# Altium PCB WRTnode2P_DB.PcbDoc (part 1 of 2)
Units mm, origin at the board's own origin, x right, y up, seen from the top; angles counter-clockwise.
Board outline 65.41 x 52.58 mm, 2 copper layers (Top Layer, Bottom Layer); 91 components, 81 nets, 456 pads, 154 vias.
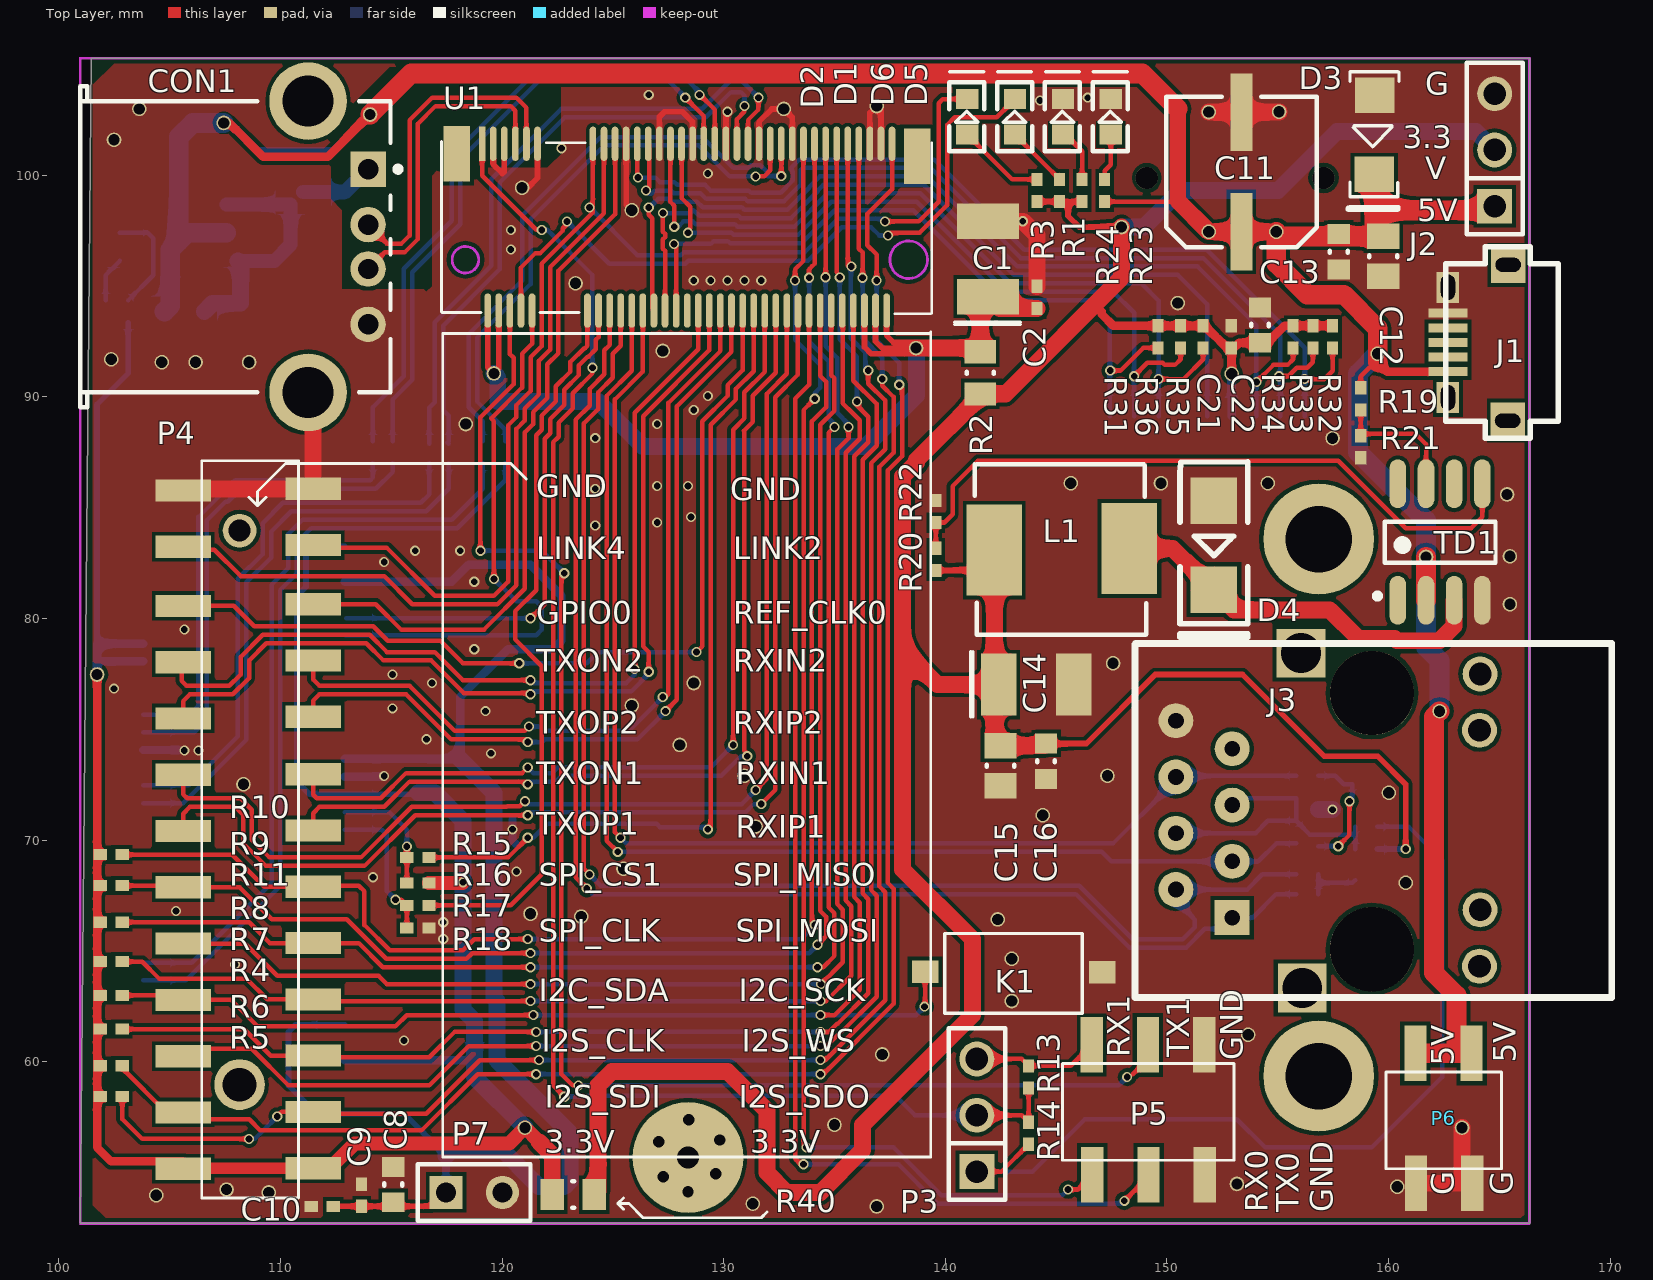
[diagram p0: Top Layer view]
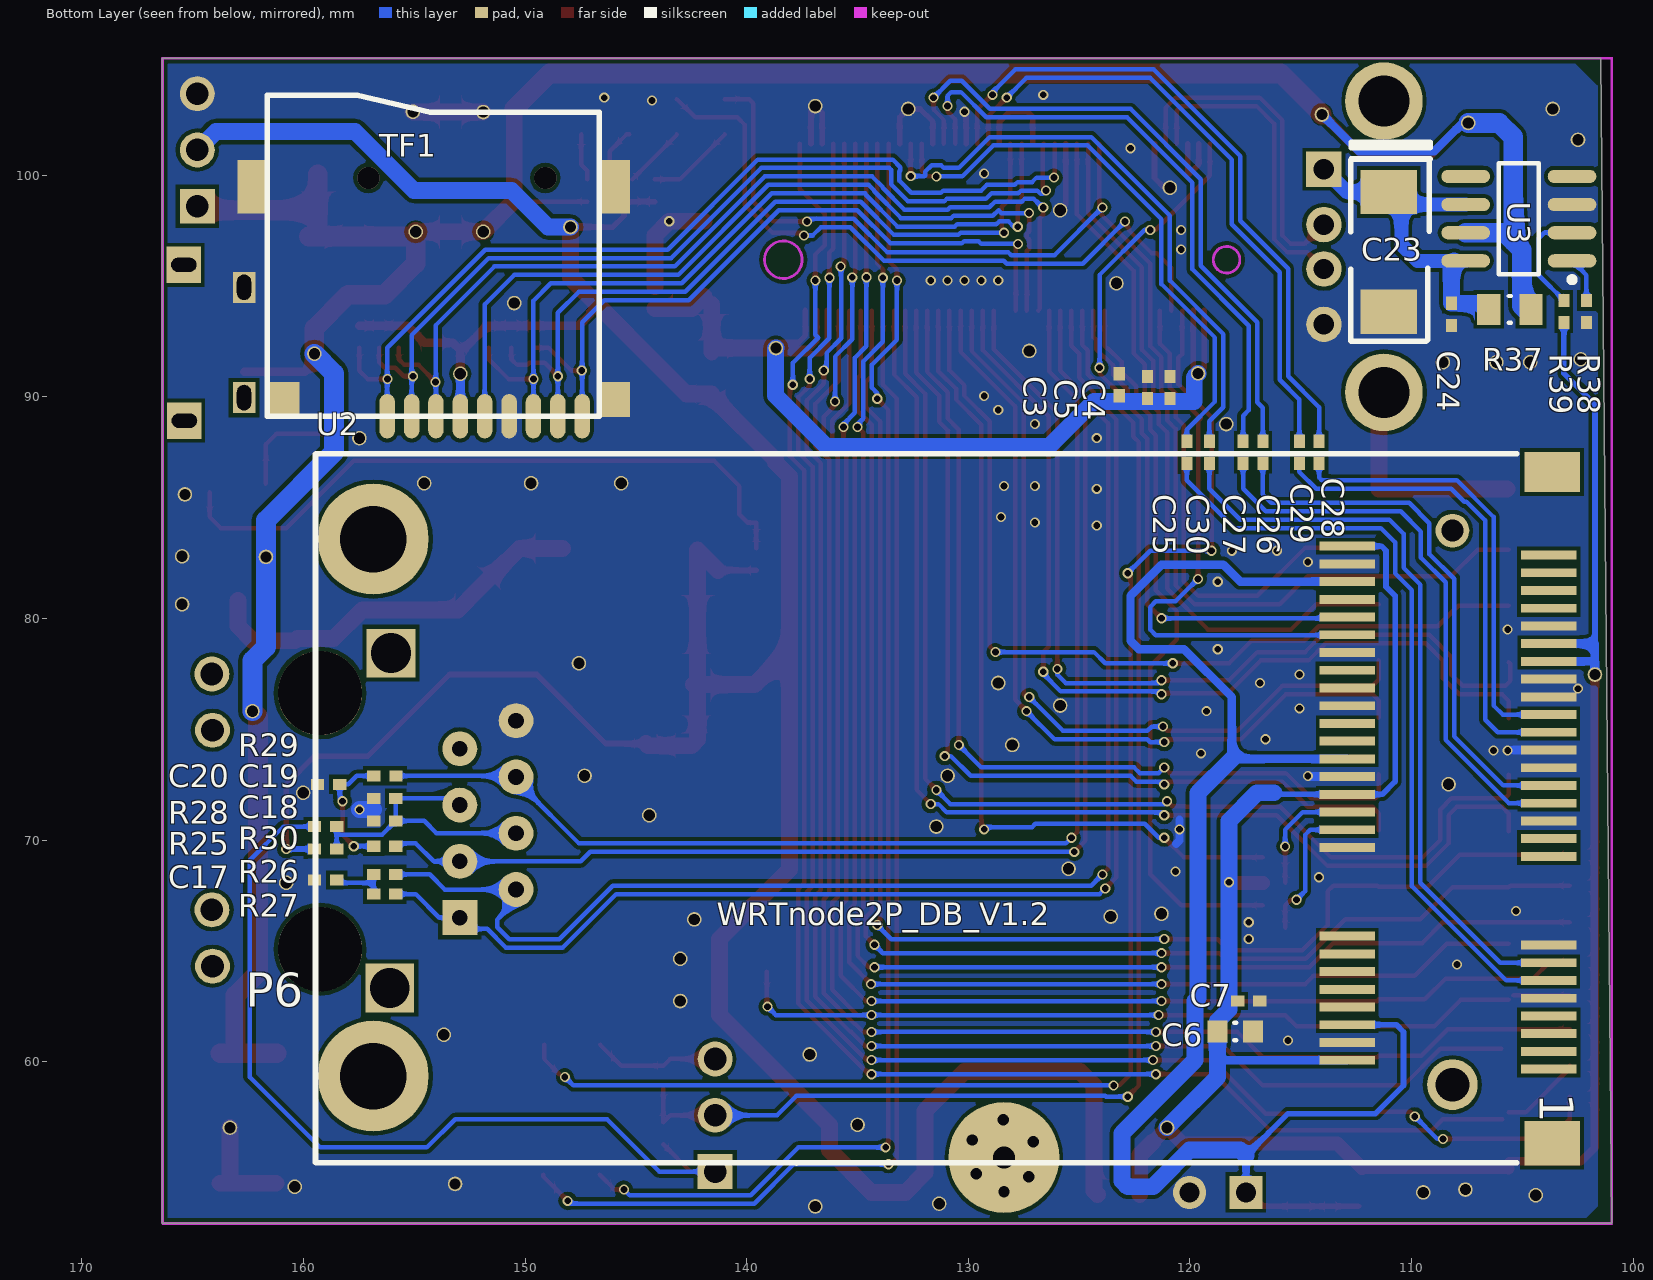
[diagram p1: Bottom Layer view, seen from below]

## Layer stack, top to bottom
Top Solder: solder mask 0.0102, Solder Resist, Dk 3.5
Top Layer: signal copper 0.0356
Dielectric 1: dielectric 0.32, FR-4, Dk 4.8
Bottom Layer: signal copper 0.0356
Bottom Solder: solder mask 0.0102, Solder Resist, Dk 3.5

## Board outline
101.473,105.283 166.37,105.283 166.37,52.705 100.965,52.705

## Design rules (kind name [scope] priority, off if disabled: settings)
Clearance [All] p1: gap=0.178
HoleSize [All] p1: absolutevalues=TRUE maxlimit=25.4 minlimit=0.025 maxpercent=80.000 minpercent=20.000
HoleToHoleClearance [All] p1: gap=0.178 allowstackedmicrovias=TRUE
MinimumSolderMaskSliver [All] p1: minsoldermaskwidth=0.076
PolygonConnect [All] p1: connectstyle=Direct reliefconductorwidth=0.254 reliefentries=4 polygonreliefangle="90 Angle" airgapwidth=0.254
RoutingVias [All] p1: holewidth=0.305 width=0.457 viastyle="Through Hole" minholewidth=0.254 minwidth=0.305 maxholewidth=7.112 maxwidth=12.7
SilkToSilkClearance [All] p1: silktosilkclearance=0
SilkToSolderMaskClearance [IsPad] p1: minsilkscreentomaskgap=0 clearancetoexposedcopper=TRUE
SolderMaskExpansion [All] p1: expansion=0.102
UnpouredPolygon [All] p1: allowunpoured=FALSE
Width [All] p1: maxlimit=2.54 minlimit=0.051 preferedwidth=0.203
24 further rules are at their usual default settings.

## Classes and differential pairs
component class Designator: C23 C24 CON1 R37 R38 R39 U3
component class Main: C25 C26 C27 C28 C29 C30 R15 R16 R17 R18

## Components (designator, comment, footprint, x,y, rotation, side; value= is the part's Value field where it differs from the comment)
C1 "B型107J" C1210-A 141.859,96.012 r90 top
C2 "100nF" 0402 144.145,94.488 r270 top
C3 "100nF" 0402 123.19,90.551 r270 bottom
C4 "100nF" 0402 120.904,90.424 r270 bottom
C5 "100nF" 0402 121.92,90.424 r270 bottom
C6 "4.7uF" C0603N 117.932,61.468 r0 bottom
C7 "100nF" 0402 117.348,62.738 r0 bottom
C8 "NC" C0603N 114.986,54.483 r270 top
C9 "NC" 0402 113.665,53.975 r270 top
C10 "NC" 0402 111.887,53.467 r0 top
C11 "220uF/16V" 16V220U 153.543,100.076 r180 top
C12 "10uF" C0805N 159.893,96.393 r90 top
C13 "100nF" C0603N 157.861,96.52 r90 top
C14 "B型107J" C1210-A 143.895,77.089 r0 top
C15 "10uF" C0805N 142.621,73.406 r90 top
C16 "100nF" C0603N 144.653,73.533 r90 top
C17 "100nF/NC" 0402 159.004,68.199 r0 bottom
C18 "10nF" 0402 156.337,70.866 r0 bottom
C19 "10nF" 0402 156.337,71.882 r180 bottom
C20 "100nF/NC" 0402 158.869,72.517 r180 bottom
C21 "100nF" 0402 152.908,92.71 r90 top
C22 "4.7uF" C0603N 154.305,93.218 r90 top
C23 "C型钽电容107A" C-6032 111.125,96.647 r90 bottom
C24 "100nF" 0402 108.204,93.726 r90 bottom
C25 "100nF" 0402 120.142,87.495 r90 bottom
C26 "100nF" 0402 116.713,87.503 r90 bottom
C27 "100nF" 0402 117.602,87.503 r90 bottom
C28 "100nF" 0402 114.173,87.503 r90 bottom
C29 "100nF" 0402 115.062,87.503 r90 bottom
C30 "100nF" 0402 119.126,87.495 r90 bottom
CON1 "90°USB弯座" 1364372 100.965,96.774 r180 top
D1 "BLUE" LED0603 143.129,102.489 r90 top
D2 "BLUE" LED0603 140.97,102.489 r90 top
D3 "4733/0.5W" ZMM5V1 159.258,101.854 r90 top
D4 "SS34" DO-02 151.892,83.185 r90 top
D5 "BLUE" LED0603 147.447,102.489 r90 top
D6 "BLUE" LED0603 145.288,102.489 r90 top
J1 "牛角MINICRO" MINIcro-USB-G 164.338,92.837 r90 top
J2 "3P单排针" SIP3-2.54 164.719,100.965 r90 top
J3 "RJ-45-RH11105A" RJ-45-HR911105A 158.496,70.993 r270 top
K1 "3*6按键，白色" 3*6KEY 143.256,64.135 r180 top
L1 "15uH/2.5A" L7.5*7.5 145.288,83.185 r0 top
P3 "3P单排针" SIP3-2.54 141.351,57.404 r90 top
P4 "双排贴片式弯针2*13" "SIP2*13-2.54 PATCH" 108.839,70.739 r90 top
P5 "双排贴片式弯针2*3" "SIP2*3-2.54 PATCH" 149.225,58.039 r0 top
P6 "双排贴片式弯针2*2" "SIP2*2-2.54 PATCH" 162.814,57.531 r0 top
P7 "NC" HDR1X2 117.475,54.102 r0 top
R1 "1K" 0402 145.161,99.314 r90 top
R2 "0Ω" R0805N 141.478,91.186 r90 top
R3 "1K" 0402 144.145,99.314 r90 top
R4 "NC" 0402 102.362,61.468 r180 top
R5 "NC" 0402 102.362,58.42 r180 top
R6 "NC" 0402 102.362,59.817 r180 top
R7 "10K" 0402 102.362,62.992 r180 top
R8 "10K" 0402 102.362,64.516 r180 top
R9 "NC" 0402 102.362,67.945 r180 top
R10 "NC" 0402 102.362,69.342 r180 top
R11 "NC" 0402 102.362,66.294 r180 top
R13 "NC" 0402 143.764,59.309 r270 top
R14 "NC" 0402 143.764,56.769 r270 top
R15 "5.1K" 0402 116.205,69.215 r180 top
R16 "6.2K" 0402 116.205,68.072 r180 top
R17 "5.1K" 0402 116.205,67.056 r180 top
R18 "6.2K" 0402 116.205,66.04 r0 top
R19 "3.6K" 0402 158.75,89.908 r90 top
R20 "6.2K" 0402 139.573,82.669 r90 top
R21 "6.2K" 0402 158.75,87.749 r270 top
R22 "3.6K" 0402 139.573,84.828 r270 top
R23 "2K" 0402 147.193,99.314 r90 top
R24 "1K" 0402 146.177,99.314 r90 top
R25 "NC" 0402 159.004,69.596 r0 bottom
R26 "49.9R/NC" 0402 156.337,68.453 r0 bottom
R27 "49.9R/NC" 0402 156.337,67.564 r0 bottom
R28 "0R/NC" 0402 159.004,70.612 r0 bottom
R29 "49.9R/NC" 0402 156.329,72.898 r180 bottom
R30 "49.9R/NC" 0402 156.337,69.723 r180 bottom
R31 "10K" 0402 149.606,92.71 r270 top
R32 "10K" 0402 157.48,92.71 r270 top
R33 "10K" 0402 156.591,92.71 r270 top
R34 "10K" 0402 155.702,92.71 r270 top
R35 "10K" 0402 151.638,92.71 r270 top
R36 "10K" 0402 150.622,92.71 r270 top
R37 "0Ω" R0805N 105.664,93.853 r0 bottom
R38 "NC" 0402 102.108,93.853 r270 bottom
R39 "NC" 0402 103.124,93.853 r270 bottom
R40 "0Ω" R0805N 123.317,54.102 r0 top
TD1 "TD1410" SOP8 161.925,83.439 r0 top
TF1 "TF卡座TFP09-2-12B" TFP09-2-12B 153.797,93.853 r0 bottom locked
U1 "NGFF座，4.0高" "NGFF M.2" 128.016,75.311 r0 top locked
U2 "MINIPCIE座，4.0高" MINIPCIE 124.333,72.263 r180 bottom locked
U3 "NC" SO8_N 105.156,98.044 r0 bottom

## Footprints (in the part's own frame and the unit in brackets; to place one, negate y for a bottom-side part, rotate by r counter-clockwise, add the part's x,y. Pads: shape width x height; smd on the part's side, far side on the other; paste and mask are expansions set on the pad)
3*6KEY [mm]
  rect 1.2x1 smd: 1(-3.835,0.102) 2(4.166,0.076)
  silkscreen extent -2.92,-1.65 3.28,1.96, body extent -2.87,-1.27 3.25,1.68, height 1.27
16V220U [mm]
  rect 1x3.5 smd: 1(0.178,2.624) 2(0.178,-2.776)
  silkscreen extent -3.22,-3.48 3.58,3.32, body extent -2.95,-3.22 3.33,3.07, height 6.1
0402 [mm] "Chip Capacitor, Body 1.0x0.5mm, IPC High Density"
  rect 0.6x0.5 smd: 1(-0.5,0) 2(0.5,0)
  body extent -0.55,-0.3 0.55,0.3, height 1.3
1364372 [mm] "Connector; USB1.1, Type A, Thru-Hole; 4 Position; Right Angle"
  rect 1.6x1.6 hole 0.92: 1(-12.99,-3.5)
  round 1.6 hole 0.92: 2(-12.99,-1) 3(-12.99,1) 4(-12.99,3.5)
  round 3.5 hole 2.3: 5(-10.28,6.57) 6(-10.28,-6.57)
  silkscreen extent -14.47,-7.25 0,7.25
C0603N [mm]
  rect 0.9x1 smd: 1(-0.775,0.102) 2(0.825,0.102)
  silkscreen extent -0.02,-0.3 0.08,0.5, body extent -0.85,-0.37 0.9,0.58, height 0.55
C0805N [mm]
  rect 1.15x1.45 smd: 1(-0.951,0.127) 2(0.849,0.127)
  silkscreen extent -0.1,-0.5 0,0.75, body extent -1.15,-0.6 1.05,0.85, height 0.75
C1210-A [mm]
  rect 1.6x2.8 smd: 1(-1.486,-0.076) 2(1.914,-0.076)
  silkscreen extent -2.74,-1.52 -2.64,1.42, body extent -1.91,-0.97 2.3,0.83, height 0.75
C-6032 [mm]
  rect 2x2.55 smd: 1(2.598,-0.096) 2(-2.802,-0.096)
  silkscreen extent -4.14,-1.96 4.85,1.63, body extent -2.41,-1.4 2.34,1.22, height 2.1
DO-02 [mm]
  rect 2.1x2.1 smd: 1(2.118,-0.229) 2(-1.882,-0.229)
  silkscreen extent -4.04,-1.75 3.89,1.3, body extent -2.5,-1.63 2.7,1.27, height 2.1
HDR1X2 [mm] "Connector; Header; 2 Position"
  rect 1.5x1.5 hole 0.9: 1(0,0)
  round 1.5 hole 0.9: 2(2.54,0)
  silkscreen extent -1.27,-1.27 3.81,1.27
L7.5*7.5 [mm]
  rect 2.5x4.1 smd: 1(3.023,-0.025) 2(-3.073,-0.102)
  silkscreen extent -3.96,-3.91 3.78,3.78, body extent -3.96,-4.04 3.86,3.81, height 5
LED0603 [mm]
  rect 0.9x1 smd: 1(-0.648,-0.025) 2(0.952,-0.025)
  silkscreen extent -1.4,-0.79 2.18,0.79, body extent -0.72,-0.5 1.03,0.45, height 1.1
MINIcro-USB-G [mil]
  rect 16x70 smd: 1(-67,65) 2(-41,65) 3(-15,65) 4(11,65) 5(37,65)
  rect 55x40 hole 25 slot 45 at 0 deg: 6(83,65) 7(-113,65)
  rect 65x61 hole 25 slot 45 at 90 deg: 8(123,-42) 9(-154,-41)
  silkscreen extent -185,-131 155,69
MINIPCIE [mm]
  round 2.286 hole 1.524 unplated: 0(16.177,-13.298)
  round 1.524 hole 0.991 unplated: 0(16.177,11.702)
  rect 2.5x0.4 smd: 1(20.527,-12.598) 2(11.427,-12.198) 3(20.527,-11.798) 4(11.427,-11.398) 5(20.527,-10.998) 6(11.427,-10.598) 7(20.527,-10.198) 8(11.427,-9.798) 9(20.527,-9.398) 10(11.427,-8.998) 11(20.527,-8.598) 12(11.427,-8.198) 13(20.527,-7.798) 14(11.427,-7.398) 15(20.527,-6.998) 16(11.427,-6.598) 17(20.527,-2.998) 18(11.427,-2.598) 19(20.527,-2.198) 20(11.427,-1.798) 21(20.527,-1.398) 22(11.427,-0.998) 23(20.527,-0.598) 24(11.427,-0.198) 25(20.527,0.202) 26(11.427,0.602) 27(20.527,1.002) 28(11.427,1.402) 29(20.527,1.802) 30(11.427,2.202) 31(20.527,2.602) 32(11.427,3.002) 33(20.527,3.402) 34(11.427,3.802) 35(20.527,4.202) 36(11.427,4.602) 37(20.527,5.002) 38(11.427,5.402) 39(20.527,5.802) 40(11.427,6.202) 41(20.527,6.602) 42(11.427,7.002) 43(20.527,7.402) 44(11.427,7.802) 45(20.527,8.202) 46(11.427,8.602) 47(20.527,9.002) 48(11.427,9.402) 49(20.527,9.802) 50(11.427,10.202) 51(20.527,10.602) 52(11.427,11.002)
  round 5 hole 3: 53(-32.523,11.322) 54(-32.523,-12.914)
  rect 2.5x1.8 smd: 55(20.677,14.352)
  rect 2.5x2 smd: 56(20.677,-15.948)
  silkscreen extent -35.13,-16.83 19.09,15.17
"NGFF M.2" [mm]
  rect 1.2x2.5 smd: 0(-10.058,25.654) 0(10.719,25.552)
  round 5 hole 1: 0(0.381,-19.634)
  rect 0.3x1.55 smd: 1(-8.915,26.111)
  oval 0.3x1.55 smd: 2(-8.661,18.587) 3(-8.415,26.111) 4(-8.161,18.587) 5(-7.915,26.111) 6(-7.661,18.587) 7(-7.415,26.111) 8(-7.161,18.587) 9(-6.915,26.111) 10(-6.661,18.587) 11(-6.415,26.111) 20(-4.161,18.587) 21(-3.915,26.111) 22(-3.661,18.587) 23(-3.415,26.111) 24(-3.161,18.587) 25(-2.915,26.111) 26(-2.661,18.587) 27(-2.415,26.111) 28(-2.161,18.587) 29(-1.915,26.111) 30(-1.661,18.587) 31(-1.415,26.111) 32(-1.161,18.587) 33(-0.915,26.111) 34(-0.661,18.587) 35(-0.415,26.111) 36(-0.161,18.587) 37(0.085,26.111) 38(0.339,18.587) 39(0.585,26.111) 40(0.839,18.587) 41(1.085,26.111) 42(1.339,18.587) 43(1.585,26.111) 44(1.839,18.587) 45(2.085,26.111) 46(2.339,18.587) 47(2.585,26.111) 48(2.839,18.587) 49(3.085,26.111) 50(3.339,18.587) 51(3.585,26.111) 52(3.839,18.587) 53(4.085,26.111) 54(4.339,18.587) 55(4.585,26.111) 56(4.839,18.587) 57(5.085,26.111) 58(5.339,18.587) 59(5.585,26.111) 60(5.839,18.587) 61(6.085,26.111) 62(6.339,18.587) 63(6.585,26.111) 64(6.839,18.587) 65(7.085,26.111) 66(7.339,18.587) 67(7.585,26.111) 68(7.839,18.587) 69(8.085,26.111) 70(8.339,18.587) 71(8.585,26.111) 72(8.839,18.587) 73(9.085,26.111) 74(9.339,18.587) 75(9.585,26.111)
  Keep-Out Layer circle w0.127: c-9.668,20.879 r0.6
  Keep-Out Layer circle w0.127: c10.334,20.879 r0.85
  silkscreen extent -10.74,-19.61 11.38,26.22
R0805N [mm]
  rect 1.05x1.4 smd: 1(-1.052,-0.102) 2(0.848,-0.102)
  silkscreen extent -0.15,-0.7 -0.05,0.5, body extent -1.2,-0.78 1,0.57, height 0.7
RJ-45-HR911105A [mil]
  rect 86.61x86.61 hole 70.87: 0(-293,-96) 0(302,-94)
  round 149.61 hole 149.61: 0(-222,30) 0(233,30)
  rect 62x62 hole 28: 1(176.89,-218.37)
  round 62 hole 28: 2(126.89,-318.37) 3(76.89,-218.37) 4(26.89,-318.37) 5(-23.11,-218.37) 6(-73.11,-318.37) 7(-123.11,-218.37) 8(-173.11,-318.37)
  round 62 hole 40: 9(263,221) 10(163,222) 11(-156,221) 12(-256,222)
  silkscreen extent -310,-391 319,456, body extent -302,-387 304,349, height 550
"SIP2*2-2.54 PATCH" [mm]
  rect 1x2.5 smd: 1(-1.575,-3.018) 2(-1.6,2.845) 3(0.965,-3.018) 4(0.94,2.845)
  silkscreen extent -2.92,-2.36 2.29,2.01, body extent -2.92,-2.29 2.29,2.03, height 8.3
"SIP2*3-2.54 PATCH" [mm]
  rect 1x2.5 smd: 1(-2.591,-3.145) 2(-2.616,2.718) 3(-0.051,-3.145) 4(-0.076,2.718) 5(2.489,-3.145) 6(2.464,2.718)
  silkscreen extent -3.94,-2.49 3.81,1.88, body extent -3.94,-2.54 3.81,1.91, height 8.3
"SIP2*13-2.54 PATCH" [mm]
  rect 1x2.5 smd: 1(-15.545,-2.637) 2(-15.57,3.226) 3(-13.005,-2.637) 4(-13.03,3.226) 5(-10.465,-2.637) 6(-10.49,3.226) 7(-7.925,-2.637) 8(-7.95,3.226) 9(-5.385,-2.637) 10(-5.41,3.226) 11(-2.845,-2.637) 12(-2.87,3.226) 13(-0.305,-2.637) 14(-0.33,3.226) 15(2.235,-2.637) 16(2.21,3.226) 17(4.826,-2.637) 18(4.75,3.226) 19(7.366,-2.637) 20(7.29,3.226) 21(9.906,-2.637) 22(9.83,3.226) 23(12.573,-2.637) 24(12.497,3.226) 25(15.113,-2.637) 26(15.037,3.226)
  silkscreen extent -16.89,-1.98 16.38,2.39, body extent -16.89,-2.06 16.38,2.41, height 8.3
SIP3-2.54 [mil]
  rect 62x62 hole 40: 1(-93,-3)
  round 62 hole 40: 2(7,-3) 3(107,-3)
  silkscreen extent -143,-53 162,47
SO8_N [mm] "SOIC, 8-Leads, Body 4.9x3.9mm, Pitch 1.27mm, IPC Medium Density"
  oval 2.2x0.6 smd: 1(-2.4,1.905) 2(-2.4,0.635) 3(-2.4,-0.635) 4(-2.4,-1.905) 5(2.4,-1.905) 6(2.4,-0.635) 7(2.4,0.635) 8(2.4,1.905)
  silkscreen extent -2.52,-2.5 0.9,2.88, body extent -2,-2.5 2,2.5, height 1.75
SOP8 [mm]
  oval 0.75x2.2 smd: 1(-1.499,-2.616) 2(-0.229,-2.616) 3(1.041,-2.616) 4(2.311,-2.616) 5(2.311,2.642) 6(1.041,2.642) 7(-0.229,2.642) 8(-1.499,2.642)
  silkscreen extent -2.55,-2.55 2.91,0.93, body extent -2.09,-2 2.91,2, height 1.75
TFP09-2-12B [mm]
  oval 0.7x2 smd: 1(2.429,4.724) 2(1.329,4.724) 3(0.229,4.724) 4(-0.871,4.724) 5(-1.971,4.724) 6(-3.071,4.724) 7(-4.171,4.724) 8(-5.271,4.724) 9(-6.371,4.724)
  rect 1.4x1.6 smd: 10(7.079,3.97) 11(-7.825,3.97)
  rect 1.4x2.4 smd: 12(8.487,-5.63) 13(-7.825,-5.63)
  silkscreen extent -7.14,-9.75 7.85,4.72
ZMM5V1 [mm]
  rect 1.6x1.8 smd: 1(1.753,-0.127) 2(-1.803,-0.102)
  silkscreen extent -3.43,-1.22 2.82,1.12, body extent -2.13,-1.02 2.07,0.78, height 0.75

## Part data
C1 C11 C14 C23: library part "Cap Pol1", "Polarized Capacitor (Radial)"
C2 C3 C4 C5 C6 C7 C8 C9 C10 C12 C13 C15 C16 C21 C22 C25 C26 C27 C28 C29 C30: library part Cap, "Capacitor"
C17 C18 C19 C20: library part "Cap Semi", "Capacitor (Semiconductor SIM Model)"
C24: library part CAP
CON1: library part USB-CON
D1 D2 D5 D6: library part LED, "LED"
D3 D4: library part Diode, "Default Diode"
J1: library part "Header 6H", "Header, 6-Pin, Right Angle"
J2 P3: library part "Header 3", "Header, 3-Pin"
J3: library part RJ-45-RH911105A
K1: library part "Header 2", "Header, 2-Pin"
L1: library part Inductor, "Inductor"
P4: library part "Header 13X2H", "Header, 13-Pin, Dual row, Right Angle"
P5: library part "Header 3X2", "Header, 3-Pin, Dual row"
P6: library part "Header 2X2H", "Header, 2-Pin, Dual row, Right Angle"
P7: library part Head2
R1 R2 R3 R4 R5 R6 R7 R8 R9 R10 R11 R13 R14 R15 R16 R17 R18 R19 R20 R21 R22 R23 R24 R25 R26 R27 R28 R29 R30 R31 R32 R33 R34 R35 R36 R37 R40: library part "Res Semi", "Semiconductor Resistor"
R38 R39: library part RES
TF1: library part TF_CARD
U1: library part core
U2: library part "PCI-E MINI CARD CONNECTOR"
U3: library part MIC2025-1

## Free pads (board coordinates)
  round 0.66 hole 0.508: 0(107.442,102.362) 0(128.422,57.379) 0(152.926,91.041) 0(155.067,102.87) 0(162.306,75.819) 1(119.634,91.059) 1(128.397,54.127) 1(151.892,102.852) 1(163.322,57.023) 2(129.819,56.464) 2(138.684,92.202) 2(154.94,97.452) 3(129.642,54.94) 3(151.892,97.452) 4(114.046,102.743) 4(127.279,54.813) 4(147.955,97.663) 5(121.031,57.023) 5(127.076,56.388) 7(101.725,77.472) 8(161.696,82.779) 9(159.512,91.948) 10(160.401,54.356) 11(153.162,54.483) 12(144.399,71.12) 13(147.32,72.898) 14(147.574,77.978) 15(149.733,86.106) 16(145.669,86.106) 17(154.559,86.106) 18(165.481,80.645) 19(165.481,82.804) 20(165.354,85.598) 21(104.648,91.567) 22(102.362,91.694) 23(106.172,91.567) 24(102.489,101.6) 25(103.632,102.997) 26(108.585,91.567) 27(121.285,66.675) 28(123.571,66.548) 29(125.476,68.707) 30(131.445,70.612) 31(130.937,72.898) 32(128.016,74.295) 33(128.651,77.089) 34(125.857,76.073) 35(109.474,54.102) 36(107.569,54.229) 37(104.394,53.975) 38(131.318,53.594) 39(136.906,53.467) 40(135.001,57.15) 41(137.16,60.325) 42(153.67,61.214) 43(160.782,68.072) 44(160.02,72.136) 45(120.904,99.441) 46(125.857,98.425) 47(132.715,102.997) 48(136.906,103.124) 49(150.495,94.234) 50(118.364,88.773) 51(123.317,95.123) 52(157.48,88.138) 53(142.367,66.421) 54(143.002,64.643) 55(143.002,62.738) 56(108.331,72.517) 57(127.254,92.075)

## Via types
v1: diameter 0.457, hole 0.305, Top Layer to Bottom Layer, tented both sides, 151 vias
v2: diameter 1, hole 1, Top Layer to Bottom Layer, 2 vias
v3: diameter 0.457, hole 0.305, Top Layer to Bottom Layer, 1 vias

## Nets (pads, with @x,y where several pads share a name; then routed paths per layer and width w, separated by ;. In a path a pad name is that pad's centre, name@x,y a point inside that pad or via, vN(x,y) a via of type N, cw(c..) or ccw(c..) an arc to the next point about the centre after c; other vN are vias at no path point)
+1.5V: C8.2 C9.2 C10.2 P7.1 U2.6 U2.28 U2.48 | length 74.4
  Top Layer w0.254: C10.2@112.395,53.475 C9.2@113.665,53.475 116.848,53.475 P7.1@117.475,54.102
  Bottom Layer w0.254: U2.6@112.906,61.665 110.687,61.665 110.363,61.341 110.363,58.928 111.633,57.658 115.57,57.658 117.475,55.753 P7.1@117.475,54.102
  Bottom Layer w0.381: U2.28@112.906,73.665 118.105,73.665 118.105,76.449 120.269,78.613 122.301,78.613 122.682,78.994 122.682,81.026 121.285,82.423 118.491,82.423 117.733,81.665 U2.48@112.906,81.665
  Bottom Layer w0.762: 117.475,55.753 117.729,56.007 120.015,56.007 121.349,54.673 121.666,54.356 122.809,54.356 123.063,54.61 123.063,56.769 119.766,60.066 119.766,62.733 119.634,62.865 119.634,72.136 118.105,73.665
C_5V: C23.1 C24.2 CON1.1 R37.2 U3.6 U3.8 | length 14.5
  Bottom Layer w0.635: U3.6@107.556,98.679 110.463,98.679 110.463,96.874 109.728,96.139 U3.8@108.077,96.139 ; C23.1@111.029,99.245 112.926,99.245 CON1.1@113.955,100.274
  Bottom Layer w0.762: R37.2@106.564,93.853 106.937,94.226 C24.2@108.204,94.226 108.204,96.012 U3.8@108.077,96.139
D0: R35.2 TF1.7 U1.35 | length 36.6
  Top Layer w0.203: U1.35@127.601,101.422 127.601,98.797 127.77,98.627 v1(127.77,97.68) ; v1(149.626,90.805) 150.749,90.805 151.638,91.694 R35.2@151.638,92.21
  Bottom Layer w0.203: v1(127.77,97.68) 127.915,97.68 127.933,97.663 128.187,97.917 128.607,97.917 128.734,97.79 130.512,97.79 130.614,97.688 133.201,97.688 134.633,99.12 134.633,99.156 134.664,99.187 138.876,99.187 142.94,95.123 148.844,95.123 149.626,94.341 TF1.7@149.626,89.129
D1: R36.2 TF1.8 U1.37 | length 34.8
  Top Layer w0.203: U1.37@128.101,101.422 128.101,98.975 128.499,98.577 128.499,97.616 128.397,97.514 v1(128.397,97.409) ; v1(148.526,90.932) 148.526,90.944 149.123,91.542 149.806,91.542 149.907,91.44 150.368,91.44 150.622,91.694 R36.2@150.622,92.21
  Bottom Layer w0.203: v1(128.397,97.409) 130.354,97.409 130.456,97.307 133.359,97.307 134.857,98.806 138.719,98.806 142.783,94.742 147.574,94.742 148.526,93.79 TF1.8@148.526,89.129
D2: R32.2 TF1.1 U1.29 | length 42
  Top Layer w0.203: v1@126.101,99.934 U1.29@126.101,101.422 ; v1(156.21,90.805) 157.099,90.805 157.48,91.186 R32.2@157.48,92.21
  Bottom Layer w0.203: v1(126.136,99.898) 126.924,99.898 127.127,99.695 127.78,99.695 127.907,99.568 129.159,99.568 129.413,99.314 131.144,99.314 131.245,99.212 132.57,99.212 133.109,99.751 133.109,100.172 133.071,100.21 133.071,100.362 133.419,100.711 139.508,100.711 143.572,96.647 151.796,96.647 156.226,92.217 TF1.1@156.226,89.129
D3: R33.2 TF1.2 U1.31 | length 41.4
  Top Layer w0.203: v1(126.492,99.314) 126.644,99.466 126.644,101.378 U1.31@126.601,101.422 ; v1(155.067,90.932) 155.479,90.932 155.86,91.313 156.337,91.313 156.591,91.567 R33.2@156.591,92.21
  Bottom Layer w0.203: v1(126.492,99.314) 126.644,99.162 126.733,99.162 126.886,99.314 127.622,99.314 127.749,99.187 128.954,99.187 129.208,98.933 130.986,98.933 131.087,98.831 132.728,98.831 133.49,99.593 133.49,100.243 133.577,100.33 139.35,100.33 143.414,96.266 151.638,96.266 155.126,92.778 TF1.2@155.126,89.129
DGND: C1.2 C2.1 C3.1 C4.1 C5.1 C6.1 C7.1 C8.1 C9.1 C10.1 C11.2 C12.1 C13.1 C14.2 C15.1 C16.1 C17.2 C18.2 C19.1 C20.1 C21.2 C22.2 C23.2 C24.1 CON1.4 D3.1 D4.1 D5.2 D6.2 J1.5 J1.6 J2.3 J3.8 K1.1 P4.25 P4.26 P5.5 P5.6 P6.1 P6.3 P7.2 pad.0@155.067,102.87 pad.1@151.892,102.852 pad.1@163.322,57.023 pad.10 pad.11 pad.12 pad.13 pad.14 pad.15 pad.16 pad.17 pad.18 pad.19 pad.20 pad.21 pad.22 pad.23 pad.24 pad.25 pad.26 pad.27 pad.28 pad.29 pad.30 pad.31 pad.32 pad.33 pad.34 pad.35 pad.36 pad.37 pad.38 pad.39 pad.40 pad.41 pad.42 pad.43 pad.44 pad.45 pad.46 pad.47 pad.48 pad.49 pad.50 pad.51 pad.52 pad.53 pad.54 pad.55 pad.56 pad.57 R18.2 R21.2 R22.1 R38.2 TD1.4 TF1.6 TF1.10 TF1.11 TF1.12 TF1.13 U1.3 U1.5 U1.11 U1.27 U1.33 U1.39 U1.45 U1.51 U1.57 U1.71 U1.73 U2.4 U2.9 U2.15 U2.18 U2.21 U2.26 U2.27 U2.29 U2.34 U2.35 U2.37 U2.40 U2.43 U2.50 U3.3 | length 50.2
  Top Layer w0.254: U1.3@119.601,101.422 119.601,100.49 120.015,100.076 120.101,100.162 U1.5@120.101,101.422 ; pad.45@120.904,99.441 121.158,99.441 121.601,99.884 U1.11@121.601,101.422 ; U1.27@125.601,101.422 125.601,98.681 pad.46@125.857,98.425 ; U1.33@127.101,101.422 127.101,102.642 127.328,102.87 128.143,102.87 128.601,102.412 U1.39@128.601,101.422 ; U1.45@130.101,101.422 130.101,102.796 v1(130.175,102.87) ; U1.51@131.601,101.422 131.601,102.42 132.178,102.997 pad.47@132.715,102.997 133.101,102.611 U1.57@133.101,101.422 ; U1.71@136.601,101.422 136.601,102.819 pad.48@136.906,103.124 137.101,102.929 U1.73@137.101,101.422
  Top Layer w0.762: P4.26@105.689,85.852 P4.25@111.476,85.852 111.476,89.973 111.245,90.204 ; C1.2@141.935,97.926 v1(143.501,97.926) 144.145,97.282 C2.1@144.145,94.988 ; pad.1@151.892,102.852 C11.2@153.365,102.852 pad.0@155.067,102.852 ; P6.1@161.239,54.513 P6.3@163.322,54.513 ; pad.1@163.322,57.023 P6.3@163.322,54.513 ; P6.3@163.779,54.513 P6.3@163.322,54.513
  Bottom Layer w0.381: U2.29@103.806,74.065 v1@105.64,74.065 ; U2.26@112.906,72.865 v1@114.648,72.865 ; 120.472,70.916 120.472,69.982 120.614,69.84
  Bottom Layer w0.762: 156.837,71.374 v1(157.48,71.374)
  other v1: 115.57,60.96 107.95,64.389 117.348,65.532 117.348,66.294 105.283,66.802 114.173,68.326 120.65,68.58 120.472,70.485 114.681,72.898 119.507,73.914 105.664,74.041 106.299,74.041 116.586,74.549 119.253,75.819 115.062,75.946 102.489,76.835 116.84,77.089 115.062,77.47 118.745,78.613 105.664,79.502 118.745,81.661 114.681,82.55 116.078,83.058 118.11,83.058 124.206,84.201 127,84.328 128.524,84.582 124.206,85.852 127,85.979 128.397,85.979 124.206,88.138 127,88.773 128.651,89.408 129.286,90.043 128.651,95.25 129.413,95.25 130.175,95.25 130.937,95.25 131.699,95.25 120.396,96.647 120.396,97.536 129.286,100.076 122.682,101.219 144.272,103.378 146.431,103.505 126.619,103.632
DM1: CON1.2 U1.9 | length 15.1
  Top Layer w0.203: CON1.2@113.955,97.774 114.828,96.901 115.443,96.901 115.824,97.282 115.824,102.489 116.84,103.505 120.65,103.505 121.101,103.054 U1.9@121.101,101.422
DP1: CON1.3 U1.7 | length 14.3
  Top Layer w0.203: CON1.3@113.955,95.774 114.701,96.52 115.601,96.52 116.205,97.124 116.205,102.331 116.998,103.124 120.396,103.124 120.601,102.919 U1.7@120.601,101.422
GPIO0: P4.22 U1.48 | length 40.7
  Top Layer w0.203: P4.22@105.613,80.569 107.899,80.569 108.822,79.646 114.186,79.646 114.839,78.994 117.221,78.994 118.237,77.978 v1(120.777,77.978) ; v1(128.778,78.486) 129.032,78.74 129.032,88.9 130.175,90.043 130.175,90.522 130.855,91.202 U1.48@130.855,93.898
  Bottom Layer w0.203: v1(120.777,77.978) 123.825,77.978 124.333,78.486 v1(128.778,78.486)
I2C_CLK: P4.7 R8.1 U1.66 | length 64.7
  Top Layer w0.203: R8.1@102.862,64.516 103.759,64.516 104.521,63.754 108.458,63.754 109.398,62.814 P4.7@111.476,62.814 ; P4.7@111.552,62.738 v1(121.285,62.738) ; v1(134.366,62.738) 134.62,62.738 135.763,63.881 135.763,67.021 135.509,67.275 135.509,87.472 136.144,88.107 136.144,88.947 135.81,89.281 135.807,89.281 135.382,89.706 135.382,93.87 U1.66@135.355,93.898
  Bottom Layer w0.203: v1(121.285,62.738) v1(134.366,62.738)
I2C_SDA: K1.2 P4.8 R7.1 U1.65 | length 80
  Top Layer w0.203: R7.1@102.862,62.992 P4.8@105.41,62.992 ; P4.8@105.613,62.789 107.772,62.789 108.966,61.595 115.189,61.595 115.697,62.103 v1(121.412,62.103) ; v1(134.366,62.103) 135.001,62.103 136.144,63.246 136.144,67.179 135.89,67.433 135.89,87.314 136.525,87.949 136.525,89.105 135.89,89.74 135.939,89.789 v1(136.017,89.789) ; U1.65@135.101,101.422 135.101,95.615 135.255,95.46 135.237,95.442 v1(135.237,95.395) ; v1@139.09,62.509 K1.2@139.09,64.059
  Bottom Layer w0.203: v1(121.412,62.103) v1(134.366,62.103) 138.684,62.103 v1(139.065,62.484) ; v1(135.237,95.395) 135.237,92.601 136.017,91.821 v1(136.017,89.789)
I2S_CLK: P4.6 U1.67 | length 73.1
  Top Layer w0.203: P4.6@105.943,60.579 108.712,60.579 110.363,58.928 116.713,58.928 118.491,60.706 v1(121.539,60.706) ; v1(134.366,60.706) 134.651,60.706 135.286,61.341 135.317,61.341 136.906,62.93 136.906,67.495 136.652,67.749 136.652,86.999 137.287,87.634 137.287,89.838 136.525,90.6 v1(136.525,91.186) ; U1.67@135.601,101.422 135.601,95.92 135.738,95.783 135.763,95.809 v1(135.763,95.885)
  Bottom Layer w0.203: v1(121.539,60.706) v1(134.366,60.706) ; v1(135.763,95.885) 135.745,95.867 135.745,94.876 135.738,94.869 135.738,92.639 136.398,91.979 136.398,91.313 v1(136.525,91.186)
I2S_SDI: P4.4 R6.1 U1.75 | length 78.4
  Top Layer w0.203: R6.1@102.862,59.817 102.862,59.698 104.851,57.709 P4.4@105.613,57.709 ; P4.4@105.918,57.404 108.585,57.404 109.093,56.896 116.363,56.896 118.903,59.436 v1(121.539,59.436) ; v1(134.366,59.436) 134.493,59.436 137.668,62.611 137.668,67.811 137.414,68.065 137.414,86.683 138.049,87.318 138.049,90.407 v1@137.922,90.534 ; v1(136.906,95.25) 136.906,96.424 136.482,96.848 136.482,98.255 137.601,99.374 U1.75@137.601,101.422
  Bottom Layer w0.203: v1(121.539,59.436) v1(134.366,59.436) ; v1(136.906,95.25) 136.906,92.802 136.779,92.675 137.922,91.532 v1(137.922,90.551)
I2S_SDO: P4.3 R5.1 U1.69 | length 78
  Top Layer w0.203: R5.1@102.862,58.42 102.862,57.412 103.759,56.515 v1(108.585,56.515) ; v1(109.855,57.531) 110.058,57.734 P4.3@111.476,57.734 ; P4.3@111.552,57.658 116.586,57.658 118.999,60.071 v1(121.666,60.071) ; v1(134.366,60.071) 134.585,60.071 137.287,62.773 137.287,67.653 137.033,67.907 137.033,86.841 137.668,87.476 137.668,89.996 137.16,90.504 v1(137.16,90.805) ; U1.69@136.101,101.422 136.101,96.69 136.271,96.52 v1(136.271,95.377)
  Bottom Layer w0.203: v1(108.585,56.515) 108.839,56.515 v1(109.855,57.531) ; v1(121.666,60.071) v1(134.366,60.071) ; v1(136.271,95.377) 136.271,92.645 137.16,91.756 v1(137.16,90.805)
I2S_WS: P4.5 R4.1 U1.68 | length 66.9
  Top Layer w0.203: R4.1@102.862,61.468 108.362,61.468 109.556,60.274 P4.5@111.476,60.274 ; P4.5@111.552,60.198 116.713,60.198 117.856,61.341 v1(121.539,61.341) ; v1(134.366,61.341) 134.747,61.341 135.128,61.722 135.159,61.722 136.525,63.088 136.525,67.337 136.271,67.591 136.271,87.157 136.906,87.792 136.906,89.68 135.855,90.731 U1.68@135.855,93.898
  Bottom Layer w0.203: v1(121.539,61.341) v1(134.366,61.341)
LINK0: U1.10 U2.42 | length 25.6
  Top Layer w0.203: v1(119.634,81.788) 119.634,88.9 119.507,89.027 120.904,90.424 120.904,91.944 121.355,92.395 U1.10@121.355,93.898
  Bottom Layer w0.203: U2.42@112.923,79.248 121.539,79.248 121.793,79.502 121.793,80.518 121.539,80.772 120.65,80.772 v1(119.634,81.788)
LINK1: R17.1 U1.20 | length 33
  Top Layer w0.203: R17.1@116.705,67.056 120.396,67.056 121.793,68.453 121.793,77.851 120.587,79.057 120.587,80.328 121.539,81.28 121.539,88.265 121.793,88.519 121.793,89.158 122.428,89.793 122.428,90.486 123.088,91.146 123.088,91.58 123.711,92.202 123.747,92.202 123.855,92.31 U1.20@123.855,93.898
LINK2: D2.2 P4.23 U1.21 | length 54.9
  Top Layer w0.203: P4.23@111.476,83.185 114.808,83.185 116.967,81.026 119.634,81.026 120.269,81.661 120.269,88.711 120.65,89.092 120.65,89.631 121.285,90.266 121.285,91.786 121.784,92.285 121.784,96.003 124.101,98.32 U1.21@124.101,101.422 ; v1(137.287,97.917) 138.811,97.917 139.7,98.806 139.7,103.251 139.89,103.441 D2.2@140.995,103.441
  Bottom Layer w0.203: v1(123.952,98.552) 126.111,96.393 128.063,96.393 128.19,96.52 133.649,96.52 135.173,98.044 137.16,98.044 v1(137.287,97.917)
LINK3: U1.22 U2.44 | length 23.5
  Top Layer w0.203: v1(121.285,80.01) 121.92,80.645 121.92,88.107 122.174,88.361 122.174,89 122.809,89.635 122.809,90.328 123.469,90.988 123.469,91.422 123.869,91.821 123.905,91.821 124.236,92.152 124.236,92.582 124.355,92.701 U1.22@124.355,93.898
  Bottom Layer w0.203: U2.44@112.961,80.01 v1(121.285,80.01)
LINK4: P4.24 U1.23 | length 38
  Top Layer w0.203: P4.24@105.613,83.109 107.01,83.109 108.204,81.915 114.681,81.915 115.951,80.645 119.792,80.645 120.65,81.503 120.65,88.554 121.031,88.935 121.031,89.473 121.666,90.108 121.666,91.629 122.165,92.128 122.165,95.845 124.601,98.281 U1.23@124.601,101.422
NetC17_1: C17.1 R26.2 R27.2 | length 2.6
  Bottom Layer w0.203: R27.2@156.837,67.564 156.837,68.072 ; R26.2@156.837,68.453 156.837,68.072 ; C17.1@158.504,68.199 158.377,68.072 156.837,68.072
NetC18_1: C18.1 J3.4 R25.1 R28.1 | length 10.2
  Bottom Layer w0.203: J3.4@150.409,70.31 154.003,70.31 154.559,70.866 C18.1@155.837,70.866 156.451,70.252 158.475,70.252 ; C18.1@155.829,70.917 155.829,71.552 ; R25.1@158.504,69.596 R28.1@158.504,70.612
NetC19_2: C19.2 J3.5 | length 3.1
  Bottom Layer w0.203: J3.5@153.251,71.882 154.737,71.882 C19.2@155.837,71.882 155.837,71.395